# EAGLE board Lighting_Controller_BoardOnly (EAGLE 9.6.2)
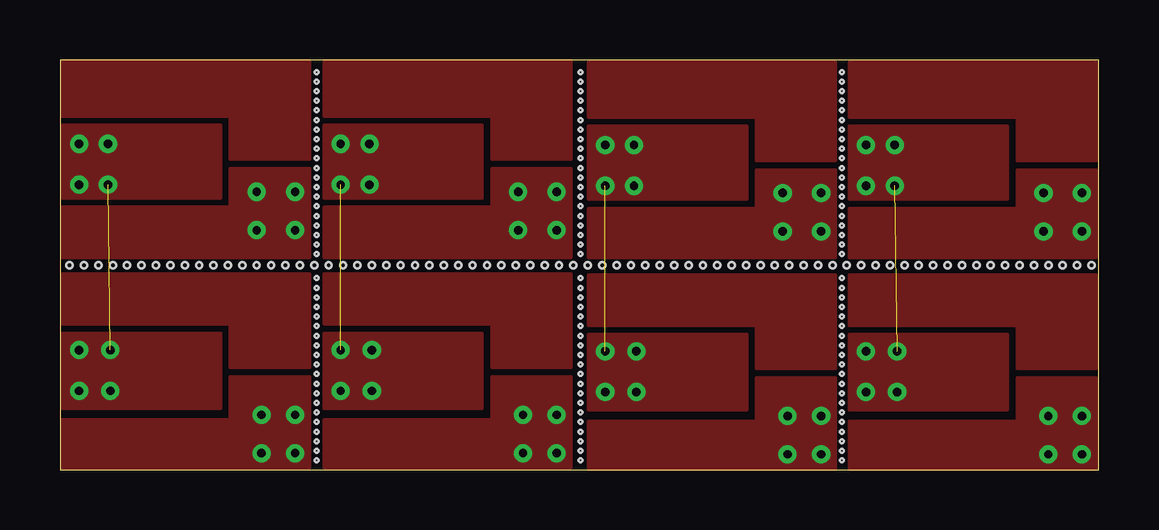
[diagram p0: board, top side]
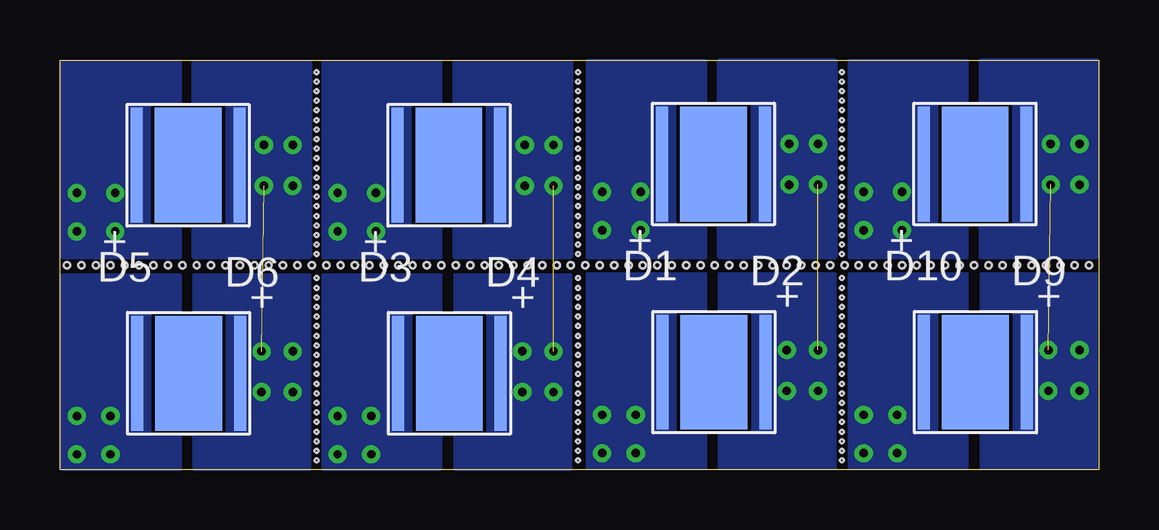
[diagram p1: board, bottom side, seen from below]

Size 43.3 x 17.1 mm. Coordinates in mm from the lower left corner, seen from the top.
Outline: 0,0 43.3,0 43.3,17.1 0,17.1 0,0
Copper layers (1*16): Top 0.035mm / dielectric 1.5mm / Bottom 0.035mm
Design rules "default *": minimum track width 6mil, minimum drill 0.35mm, track to track 6mil, track to pad 6mil, pad to pad 6mil, via to via 6mil, smd to smd 6mil, copper to edge 0mil, drill to drill 6mil, minimum pad ring 10mil, minimum via ring 8mil, stop-mask expansion 4mil, vias tented up to drill 0mil, thermal gap 10mil
Holes 0.15 mm at 10.7,9 10.7,8 10.7,7.6 10.7,7.2 10.7,6.8 10.7,6.4 10.7,6 10.7,5.6 10.7,5.2 10.7,4.8 10.7,4.4 10.7,4 10.7,3.6 10.7,3.2 10.7,2.8 10.7,2.4 10.7,2 10.7,1.6 10.7,1.2 10.7,0.8 10.7,0.4 10.7,9.4 10.7,9.8 10.7,10.2 10.7,10.6 10.7,11 10.7,11.4 10.7,11.8 10.7,12.2 10.7,12.6 10.7,13 10.7,13.4 10.7,13.8 10.7,14.2 10.7,14.6 10.7,15 10.7,15.4 10.7,15.8 10.7,16.2 10.7,16.6 21.7,8 21.7,7.6 21.7,7.2 21.7,6.8 21.7,6.4 21.7,6 21.7,5.6 21.7,5.2 21.7,4.8 21.7,4.4 21.7,4 21.7,3.6 21.7,3.2 21.7,2.8 21.7,2.4 21.7,2 21.7,1.6 21.7,1.2 21.7,0.8 21.7,0.4 32.6,8 32.6,7.6 32.6,7.2 32.6,6.8 32.6,6.4 32.6,6 32.6,5.6 32.6,5.2 32.6,4.8 32.6,4.4 32.6,4 32.6,3.6 32.6,3.2 32.6,2.8 32.6,2.4 32.6,2 32.6,1.6 32.6,1.2 32.6,0.8 32.6,0.4 21.7,16.6 21.7,16.2 21.7,15.8 21.7,15.4 21.7,15 21.7,14.6 21.7,14.2 21.7,13.8 21.7,13.4 21.7,13 21.7,12.6 21.7,12.2 21.7,11.8 21.7,11.4 21.7,11 21.7,10.6 21.7,10.2 21.7,9.8 21.7,9.4 21.7,9 32.6,16.6 32.6,16.2 32.6,15.8 32.6,15.4 32.6,15 32.6,14.6 32.6,14.2 32.6,13.8 32.6,13.4 32.6,13 32.6,12.6 32.6,12.2 32.6,11.8 32.6,11.4 32.6,11 32.6,10.6 32.6,10.2 32.6,9.8 32.6,9.4 32.6,9
Holes 0.25 mm at 1,8.53 0.4,8.53 1.6,8.53 2.2,8.53 2.8,8.53 3.4,8.53 4,8.53 4.6,8.53 5.2,8.53 5.8,8.53 6.4,8.53 7,8.53 7.6,8.53 8.2,8.53 8.8,8.53 9.4,8.53 10,8.53 10.6,8.53 11.2,8.53 11.8,8.53 12.4,8.53 13,8.53 13.6,8.53 14.2,8.53 14.8,8.53 15.4,8.53 16,8.53 16.6,8.53 17.2,8.53 17.8,8.53 18.4,8.53 19,8.53 19.6,8.53 20.2,8.53 20.8,8.53 21.4,8.53 22,8.53 22.6,8.53 23.2,8.53 23.8,8.53 24.4,8.53 25,8.53 25.6,8.53 26.2,8.53 26.8,8.53 27.4,8.53 28,8.53 28.6,8.53 29.2,8.53 29.8,8.53 30.4,8.53 31,8.53 31.6,8.53 32.2,8.53 32.8,8.53 33.4,8.53 34,8.53 34.6,8.53 35.2,8.53 35.8,8.53 36.4,8.53 37,8.53 37.6,8.53 38.2,8.53 38.8,8.53 39.4,8.53 40,8.53 40.6,8.53 41.2,8.53 41.8,8.53 42.4,8.53 43,8.53

## Footprints (pad centres in the part's own frame; a part is rotated, then mirrored left to right if it is on the bottom)
XLAMP_XM-L2 = smd 0.5 x 4.78: 1 2.14,0; 2 -2.14,0 | smd 2.78 x 4.78: THERMAL 0,0

## Placement (x,y rotation side)
D1  XLAMP_XM-L2  [XLAMP_XM-L2]  16.04,4.08 0 bottom
D2  XLAMP_XM-L2  [XLAMP_XM-L2]  16.06,12.76 180 bottom
D3  XLAMP_XM-L2  [XLAMP_XM-L2]  27.07,4.03 0 bottom
D4  XLAMP_XM-L2  [XLAMP_XM-L2]  27.09,12.71 180 bottom
D5  XLAMP_XM-L2  [XLAMP_XM-L2]  37.94,4.03 0 bottom
D6  XLAMP_XM-L2  [XLAMP_XM-L2]  37.96,12.71 180 bottom
D9  XLAMP_XM-L2  [XLAMP_XM-L2]  5.16,12.76 180 bottom
D10  XLAMP_XM-L2  [XLAMP_XM-L2]  5.14,4.08 0 bottom

## Library data of the parts
D1-D6 D9 D10 = CreeXLamp_XM-L2

## Nets
12V: D9.1
12V1: D2.1
12V2: D4.1
12V3: D6.1
GND: D10.2
GND1: D1.2
GND2: D3.2
GND3: D5.2
N$1: D1.1 D2.2
N$2: D3.1 D4.2
N$3: D5.1 D6.2
N$12: D9.2 D10.1

## Tracks (layer width: path | path; a pad name or v marks a point on that pad's centre or on a via)
12V  (via drill 0.35)
  other vias: 8.2,10 9.8,10 8.2,11.6 9.8,11.6
  pour Top (no thermals): 0.1,8.18 0.1,6.08 7.1,6.08 7.1,4.28 10.4,4.28 10.4,8.18
  pour Bottom (no thermals): 5.5,8.86 5.5,17.06 10.4,17.06 10.4,8.86
  pour Top (no thermals): 10.4,8.86 0.1,8.86 0.1,10.96 7.1,10.96 7.1,12.56 10.4,12.56
12V1  (via drill 0.35)
  other vias: 19.1,10 20.7,10 19.1,11.6 20.7,11.6
  pour Top (no thermals): 11,8.18 11,6.08 18,6.08 18,4.28 21.3,4.28 21.3,8.18
  pour Bottom (no thermals): 16.4,8.86 16.4,17.06 21.3,17.06 21.3,8.86
  pour Top (no thermals): 21.3,8.86 11,8.86 11,10.96 18,10.96 18,12.56 21.3,12.56
12V2  (via drill 0.35)
  other vias: 30.13,9.95 31.73,9.95 30.13,11.55 31.73,11.55
  pour Top (no thermals): 22.03,8.13 22.03,6.03 29.03,6.03 29.03,4.23 32.33,4.23 32.33,8.13
  pour Bottom (no thermals): 27.43,8.86 27.43,17.01 32.33,17.01 32.33,8.86
  pour Top (no thermals): 32.33,8.86 22.03,8.86 22.03,10.91 29.03,10.91 29.03,12.51 32.33,12.51
12V3  (via drill 0.35)
  other vias: 41,9.95 42.6,9.95 41,11.55 42.6,11.55
  pour Top (no thermals): 32.9,8.13 32.9,6.03 39.9,6.03 39.9,4.23 43.2,4.23 43.2,8.13
  pour Bottom (no thermals): 38.3,8.86 38.3,17.01 43.2,17.01 43.2,8.86
  pour Top (no thermals): 43.2,8.86 32.9,8.86 32.9,10.91 39.9,10.91 39.9,12.51 43.2,12.51
GND  (via drill 0.35)
  other vias: 8.4,2.3 9.8,2.3 8.4,0.7 9.8,0.7
  pour Bottom (no thermals): 5.5,8.18 10.4,8.18 10.4,0.08 5.5,0.08
  pour Top (no thermals): 0.1,0.08 0.1,2.08 7.1,2.08 7.1,3.88 10.4,3.88 10.4,0.08
  pour Top (no thermals): 0.1,14.76 7.1,14.76 7.1,12.96 10.4,12.96 10.4,17.06 0.1,17.06
GND1  (via drill 0.35)
  other vias: 19.3,2.3 20.7,2.3 19.3,0.7 20.7,0.7
  pour Bottom (no thermals): 16.4,8.18 21.3,8.18 21.3,0.08 16.4,0.08
  pour Top (no thermals): 11,0.08 11,2.08 18,2.08 18,3.88 21.3,3.88 21.3,0.08
  pour Top (no thermals): 11,14.76 18,14.76 18,12.96 21.3,12.96 21.3,17.06 11,17.06
GND2  (via drill 0.35)
  other vias: 30.33,2.25 31.73,2.25 30.33,0.65 31.73,0.65
  pour Bottom (no thermals): 27.43,8.13 32.33,8.13 32.33,0.03 27.43,0.03
  pour Top (no thermals): 22.03,0.03 22.03,2.03 29.03,2.03 29.03,3.83 32.33,3.83 32.33,0.03
  pour Top (no thermals): 22.03,14.71 29.03,14.71 29.03,12.91 32.33,12.91 32.33,17.01 22.03,17.01
GND3  (via drill 0.35)
  other vias: 41.2,2.25 42.6,2.25 41.2,0.65 42.6,0.65
  pour Bottom (no thermals): 38.3,8.13 43.2,8.13 43.2,0.03 38.3,0.03
  pour Top (no thermals): 32.9,0.03 32.9,2.03 39.9,2.03 39.9,3.83 43.2,3.83 43.2,0.03
  pour Top (no thermals): 32.9,14.71 39.9,14.71 39.9,12.91 43.2,12.91 43.2,17.01 32.9,17.01
N$1  (via drill 0.35)  (1 unrouted)
  other vias: 11.7,5 13,5 13,3.3 11.7,3.3 11.7,13.6 12.9,11.9 11.7,11.9 12.9,13.6
  pour Bottom (no thermals): 15.8,8.18 15.8,0.08 11,0.08 11,8.18
  pour Top: 11,5.7 17.6,5.7 17.6,2.56 11,2.56
  pour Bottom (no thermals): 15.8,8.89 15.8,17.06 11,17.06 11,8.89
  pour Top (no thermals): 11,11.34 11,14.38 17.6,14.38 17.6,11.34
N$2  (via drill 0.35)  (1 unrouted)
  other vias: 22.73,4.95 24.03,4.95 24.03,3.25 22.73,3.25 22.73,13.55 23.93,11.85 22.73,11.85 23.93,13.55
  pour Bottom (no thermals): 26.83,8.13 26.83,0.03 22.03,0.03 22.03,8.13
  pour Top: 22.03,5.65 28.63,5.65 28.63,2.51 22.03,2.51
  pour Bottom (no thermals): 26.83,8.89 26.83,17.01 22.03,17.01 22.03,8.89
  pour Top (no thermals): 22.03,11.29 22.03,14.33 28.63,14.33 28.63,11.29
N$3  (via drill 0.35)  (1 unrouted)
  other vias: 33.6,4.95 34.9,4.95 34.9,3.25 33.6,3.25 33.6,13.55 34.8,11.85 33.6,11.85 34.8,13.55
  pour Bottom (no thermals): 37.7,8.13 37.7,0.03 32.9,0.03 32.9,8.13
  pour Top: 32.9,5.65 39.5,5.65 39.5,2.51 32.9,2.51
  pour Bottom (no thermals): 37.7,8.89 37.7,17.01 32.9,17.01 32.9,8.89
  pour Top (no thermals): 32.9,11.29 32.9,14.33 39.5,14.33 39.5,11.29
N$12  (via drill 0.35)  (1 unrouted)
  other vias: 0.8,5 2.1,5 2.1,3.3 0.8,3.3 0.8,13.6 2,11.9 0.8,11.9 2,13.6
  pour Bottom (no thermals): 4.9,8.18 4.9,0.08 0.1,0.08 0.1,8.18
  pour Top: 0.1,5.7 6.7,5.7 6.7,2.56 0.1,2.56
  pour Bottom (no thermals): 4.9,8.89 4.9,17.06 0.1,17.06 0.1,8.89
  pour Top (no thermals): 0.1,11.34 0.1,14.38 6.7,14.38 6.7,11.34

## Text on the board
_bNames: D9 | D9 | D9 | D1 | D2 | D9 | D3 | D9 | D10 | D10 | D10 | D4 | D5 | D10 | D6 | D10